# EAGLE board JDM2_Basic_No_Top_Aligned (EAGLE 7.2.0)
JDM2 Basic Design
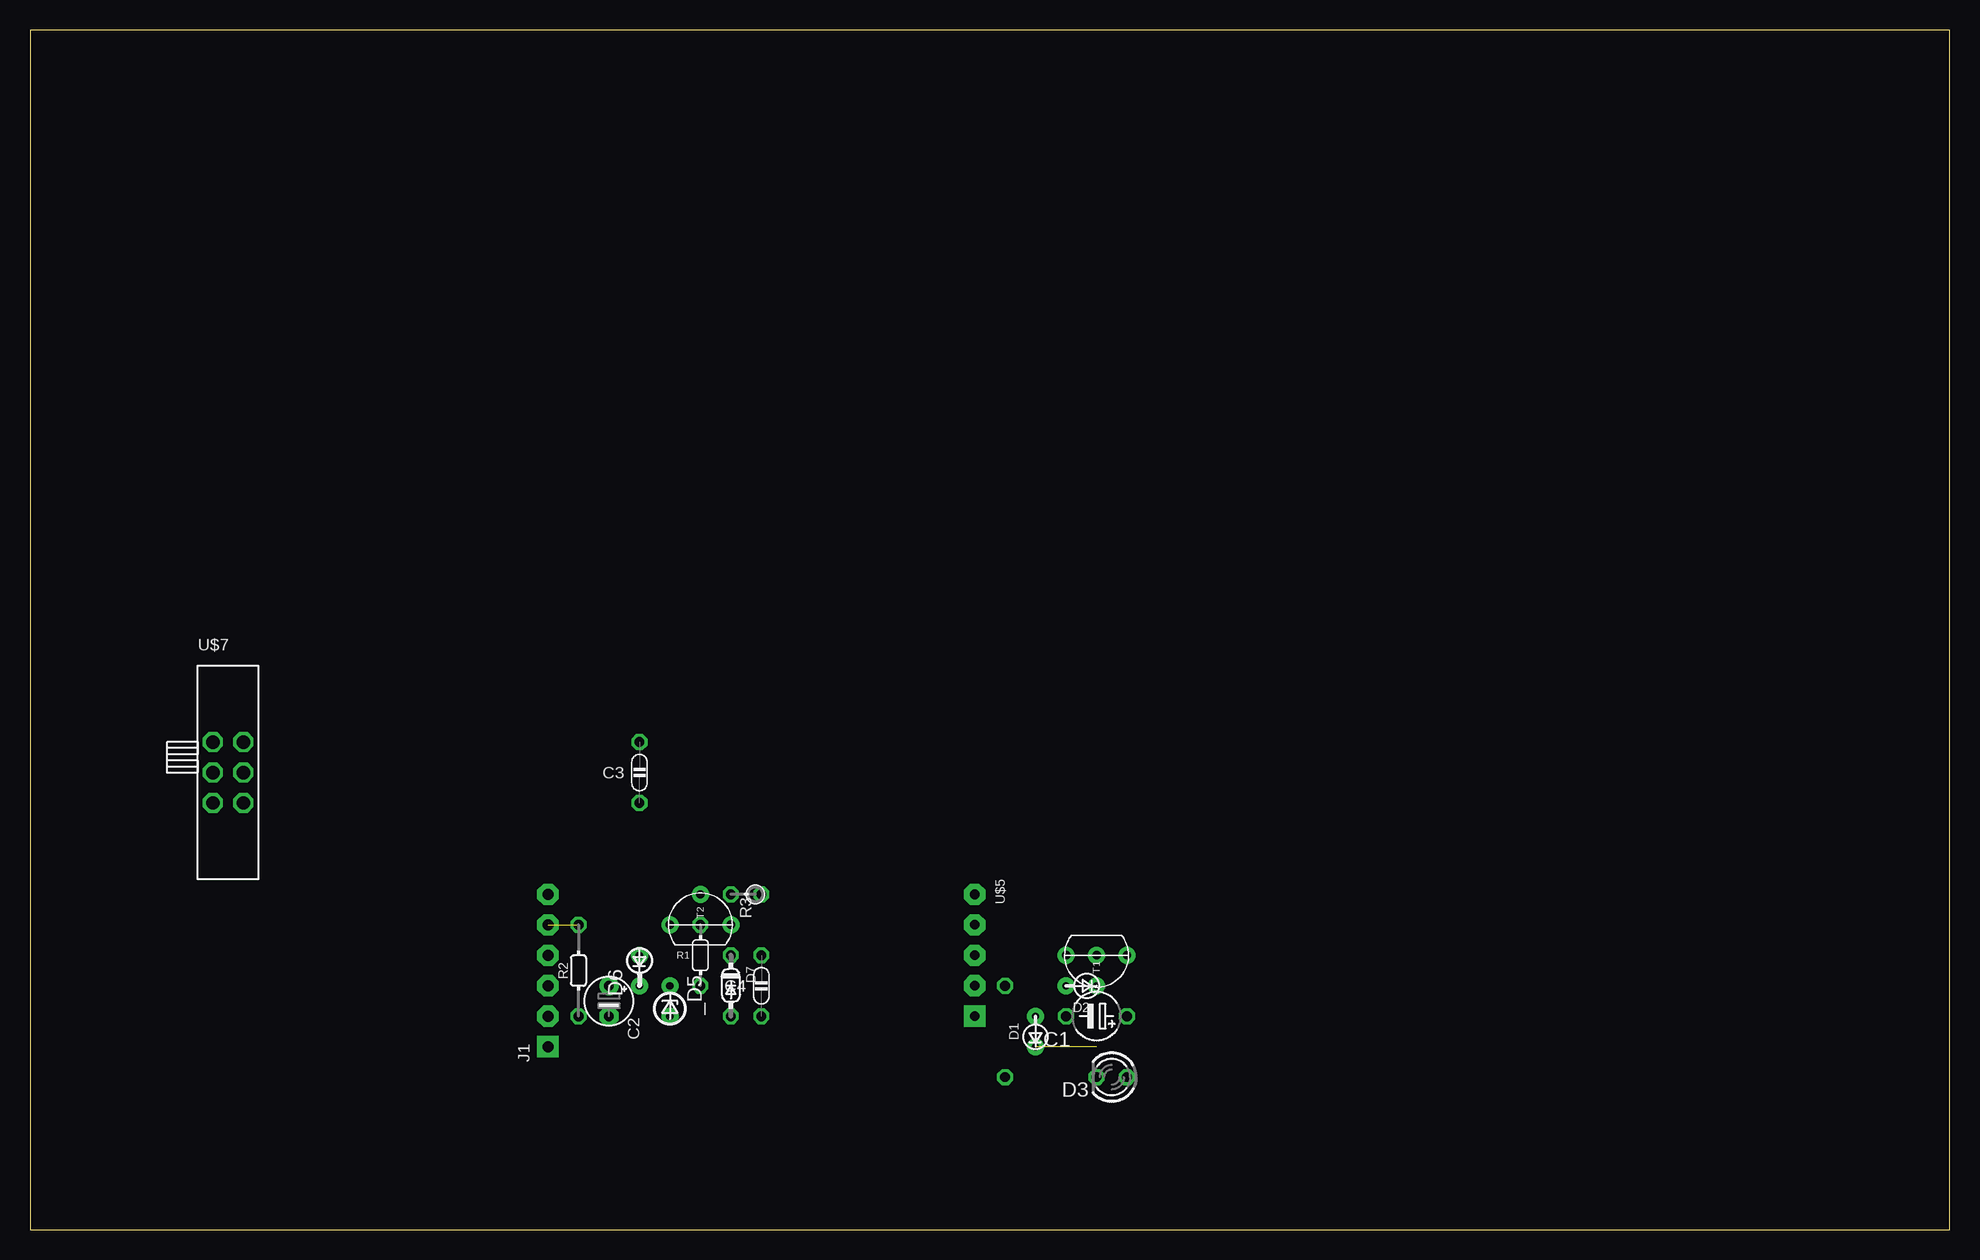
[diagram p0: board, top side]
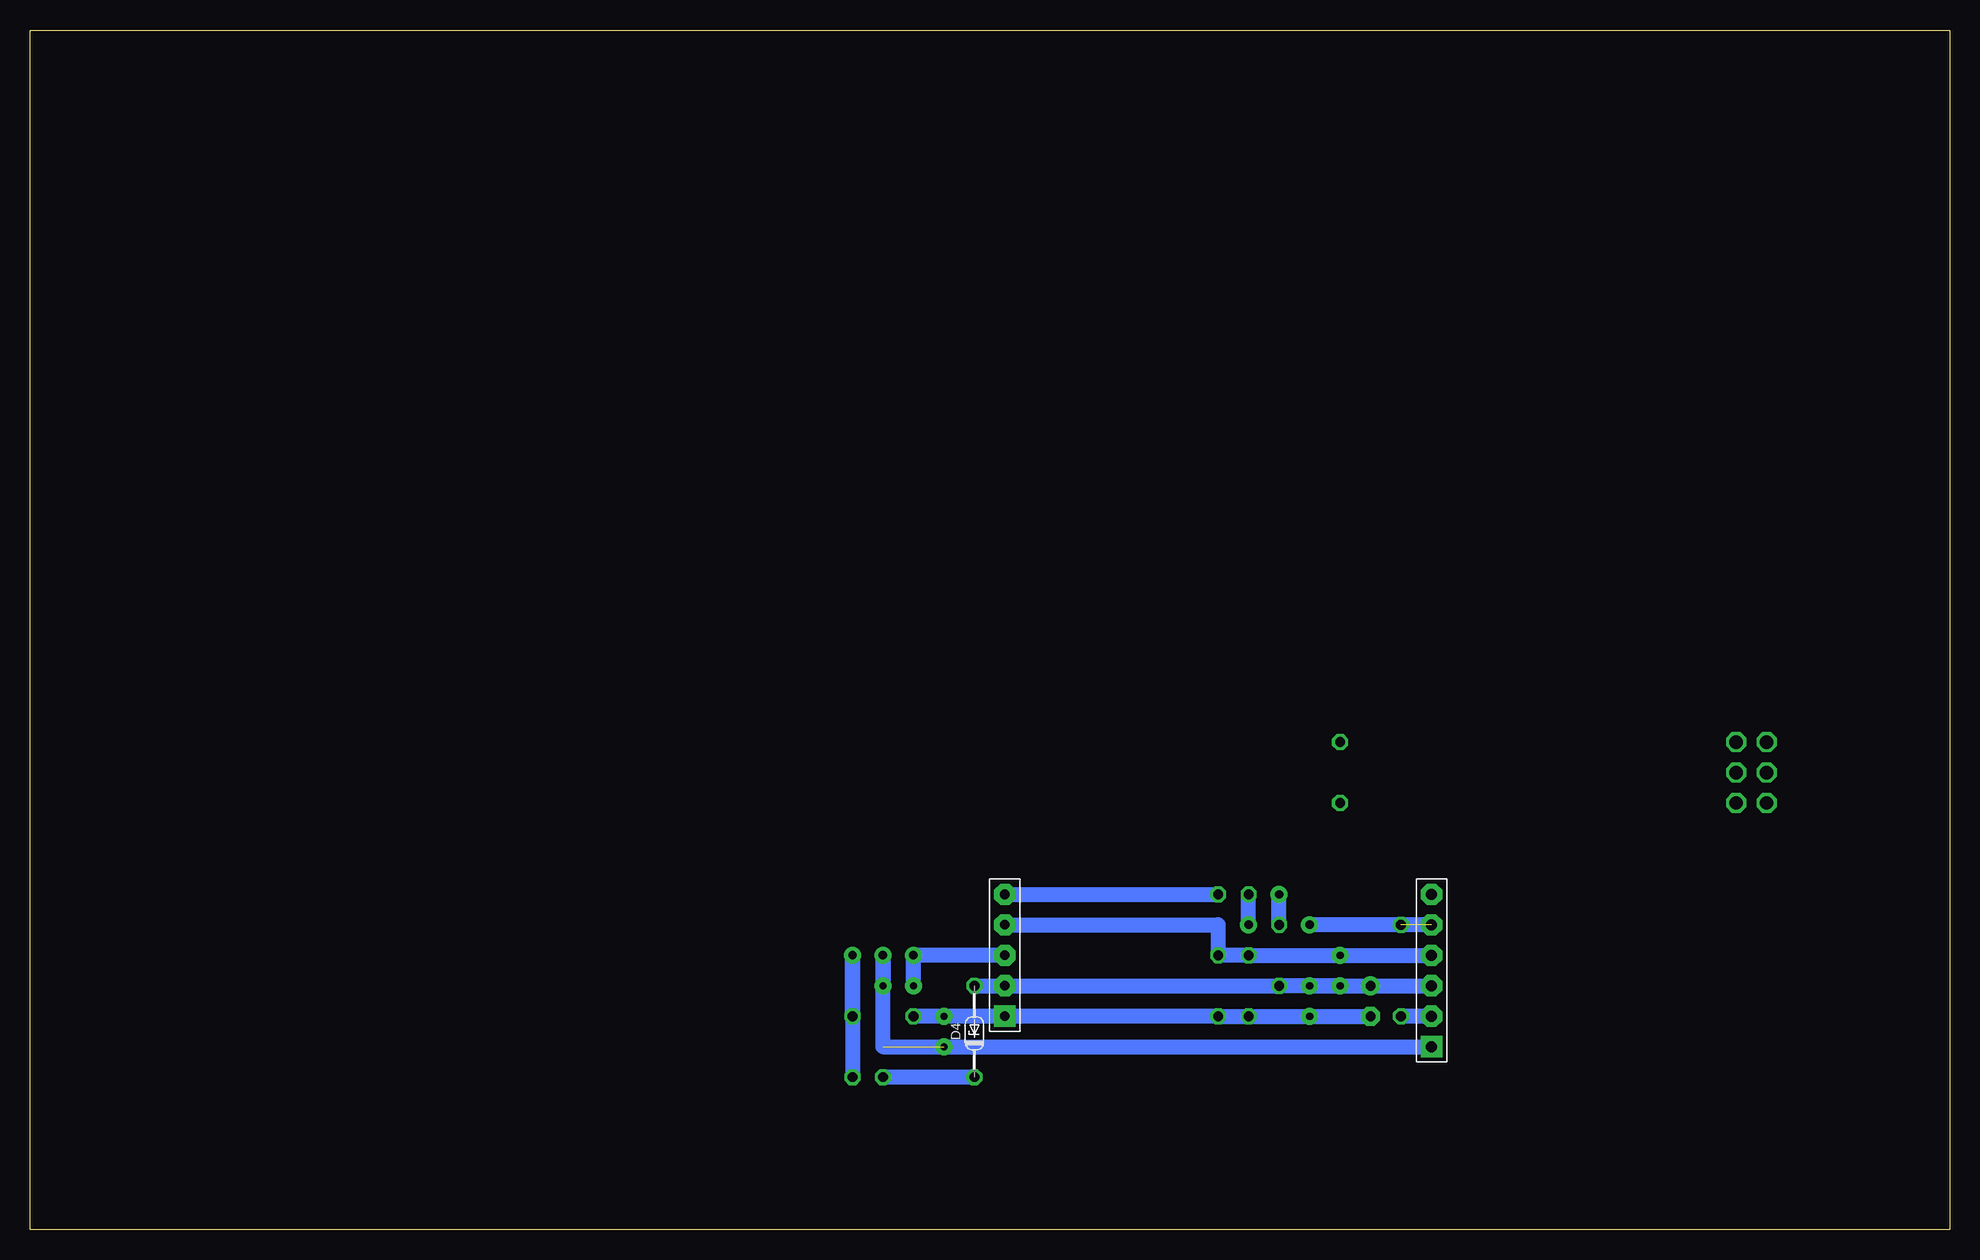
[diagram p1: board, bottom side, seen from below]

Size 160 x 100 mm. Coordinates in mm from the lower left corner, seen from the top.
Outline: 0,0 160,0 160,100 0,100 0,0
Copper layers (1*16): Top 0.035mm / dielectric 1.5mm / Bottom 0.035mm
Design rules "default": minimum track width 10mil, minimum drill 24mil, track to track 8mil, track to pad 8mil, pad to pad 8mil, via to via 8mil, smd to smd 8mil, copper to edge 40mil, drill to drill 8mil, minimum pad ring 10mil, minimum via ring 8mil, stop-mask expansion 4mil, vias tented up to drill 0mil, thermal gap 10mil
Net classes: 0 default: width 0.559 mm; 1 power: width 0.559 mm

## Footprints (pad centres in the part's own frame; a part is rotated, then mirrored left to right if it is on the bottom)
DO35Z2_54 = drill 0.6 pad 1.422: A 1.27,0; C -1.27,0
E5-4 = drill 0.813 octagon: + -2.54,0; - 2.54,0
E2,5-4 = drill 0.813 pad 1.6: + 1.27,0 | drill 0.813 pad 1.6 octagon: - -1.27,0
C050-020X036 = drill 0.813 octagon: 1 0,2.54; 2 0,-2.54
DO34-2,5-A = drill 0.6 pad 1.422: A 1.27,0; C -1.27,0
LED3MM = drill 0.813 octagon: A -1.27,0; K 1.27,0
DO34Z7 = drill 0.813 octagon: A 3.81,0; C -3.81,0
DO34-2,5 = drill 0.6 pad 1.422: A 1.27,0; C -1.27,0
DO34-5 = drill 0.813 octagon: A 2.54,0; C -2.54,0
RS232-6PIN = drill 0.9 pad 1.778 square: 1 0,0 | drill 0.9 pad 1.778 octagon: 2 2.54,0; 3 5.08,0; 4 7.62,0; 5 10.16,0; 6 12.7,0
0202/5 = drill 0.813 octagon: 1 0,-2.54; 2 0,2.54
0202/7 = drill 0.813 octagon: 1 0,-3.81; 2 0,3.81
0202/2V = drill 0.813 octagon: 1 0,-1.27; 2 0,1.27
TO92-CBE = drill 0.7 pad 1.422: B 0,0; C 0,2.54; E 0,-2.54
TO92-CBE-A = drill 0.7 pad 1.422: B 2.54,0; C 0,2.54; E 0,-2.54
PIC-ICSP = drill 0.8 pad 1.778 square: 1 -5.08,0 | drill 0.8 pad 1.778 octagon: 2 -2.54,0; 3 0,0; 4 2.54,0; 5 5.08,0
SLSW-2P2T-H = drill 1.118 pad 1.524 octagon: 1 -1.27,2.54; 2 -1.27,0; 3 -1.27,-2.54; 4 1.27,2.54; 5 1.27,0; 6 1.27,-2.54

## Placement (x,y rotation side)
_D5  Z=5.1V  [DO35Z2_54]  53.34,19.05 270 top
C1  100μF  [E5-4]  88.9,17.78 180 top
C2  22μF  [E2,5-4]  48.26,19.05 90 top
C3  39pF  [C050-020X036]  50.8,38.1 0 top
C4  39pF  [C050-020X036]  60.96,20.32 0 top
D1  1N4148  [DO34-2,5-A]  83.82,16.51 90 top
D2  1N4148  [DO34-2,5-A]  87.63,20.32 180 top
D3  Vpp  [LED3MM]  90.17,12.7 180 top
D4  Z=8.1V  [DO34Z7]  81.28,16.51 90 bottom
D6  1N4148  [DO34-2,5]  50.8,21.59 90 top
D7  1N4148  [DO34-5]  58.42,20.32 270 top
J1  COMPORT-6PIN  [RS232-6PIN]  43.18,15.24 90 top
R1  10kΩ  [0202/5]  55.88,22.86 180 top
R2  1.5kΩ  [0202/7]  45.72,21.59 0 top
R3  100Ω  [0202/2V]  59.69,27.94 90 top
T1  BC547CBE  [TO92-CBE]  88.9,22.86 270 top
T2  BC547CBE-A  [TO92-CBE-A]  55.88,25.4 90 top
U$5  PIC-ICSPICSP  [PIC-ICSP]  78.74,22.86 90 top
U$7  SL-SW-2P-2T-H  [SLSW-2P2T-H]  16.51,38.1 0 top

## Library data of the parts
_D5 D1 D2 D4 D6 D7 = d
C1-C4 = c
D3 = led
J1 U$5 = pinconn
R1-R3 = r
T1 T2 = t
U$7 = sw

## Nets
/MCLR: D2.A T1.E U$5.3
CLK: C4.1 D6.A D7.C J1.4 U$5.4
CTS: J1.5 R2.2 T2.C
DATA: R3.2 T2.E
DTR: J1.2 R2.1
N$1: R1.1 T2.B
N$5: D3.K D4.C
PGD: R3.1 U$5.5
TXD: D1.C D2.C J1.1 T1.B
VDD: _D5.C C2.+ D4.A D6.C J1.3 R1.2 U$5.2
VPP: C1.+ D3.A T1.C
VSS: _D5.A C1.- C2.- C4.2 D1.A D7.A U$5.1

## Tracks (layer width: path | path; a pad name or v marks a point on that pad's centre or on a via)
/MCLR
  Bottom 1.27: U$5.3 T1.E D2.A
CLK
  Bottom 1.27: J1.4 D6.A D7.C C4.1 60.96,25.4 U$5.4
CTS  (1 unrouted)
  Bottom 1.27: J1.5 T2.C
DATA
  Bottom 1.27: T2.E R3.2
DTR
  Bottom 1.27: J1.2 R2.1
N$1
  Bottom 1.27: R1.1 T2.B
N$5
  Bottom 1.27: D4.C D3.K
PGD
  Bottom 1.27: U$5.5 R3.1
TXD  (1 unrouted)
  Bottom 1.27: J1.1 88.9,15.24 T1.B D2.C
VDD
  Bottom 1.27: D4.A U$5.2 R1.2 _D5.C | C2.+ D6.C _D5.C | C2.+ J1.3 | _D5.C C2.+
VPP
  Bottom 1.27: C1.+ T1.C D3.A
VSS
  Bottom 1.27: C2.- _D5.A D7.A C4.2 U$5.1 D1.A C1.-